# Altium PCB MCU103A.PcbDoc (part 5 of 6)
Units mm, origin at the board's own origin, x right, y up, seen from the top; angles counter-clockwise.
Board outline 58.42 x 139.7 mm, 4 copper layers (Top Signal, GND, PWR, Bottom Signal), stack 1.565 mm thick; 256 components, 210 nets, 1058 pads, 772 vias.
Unrouted connection lines stored in the file: 237.
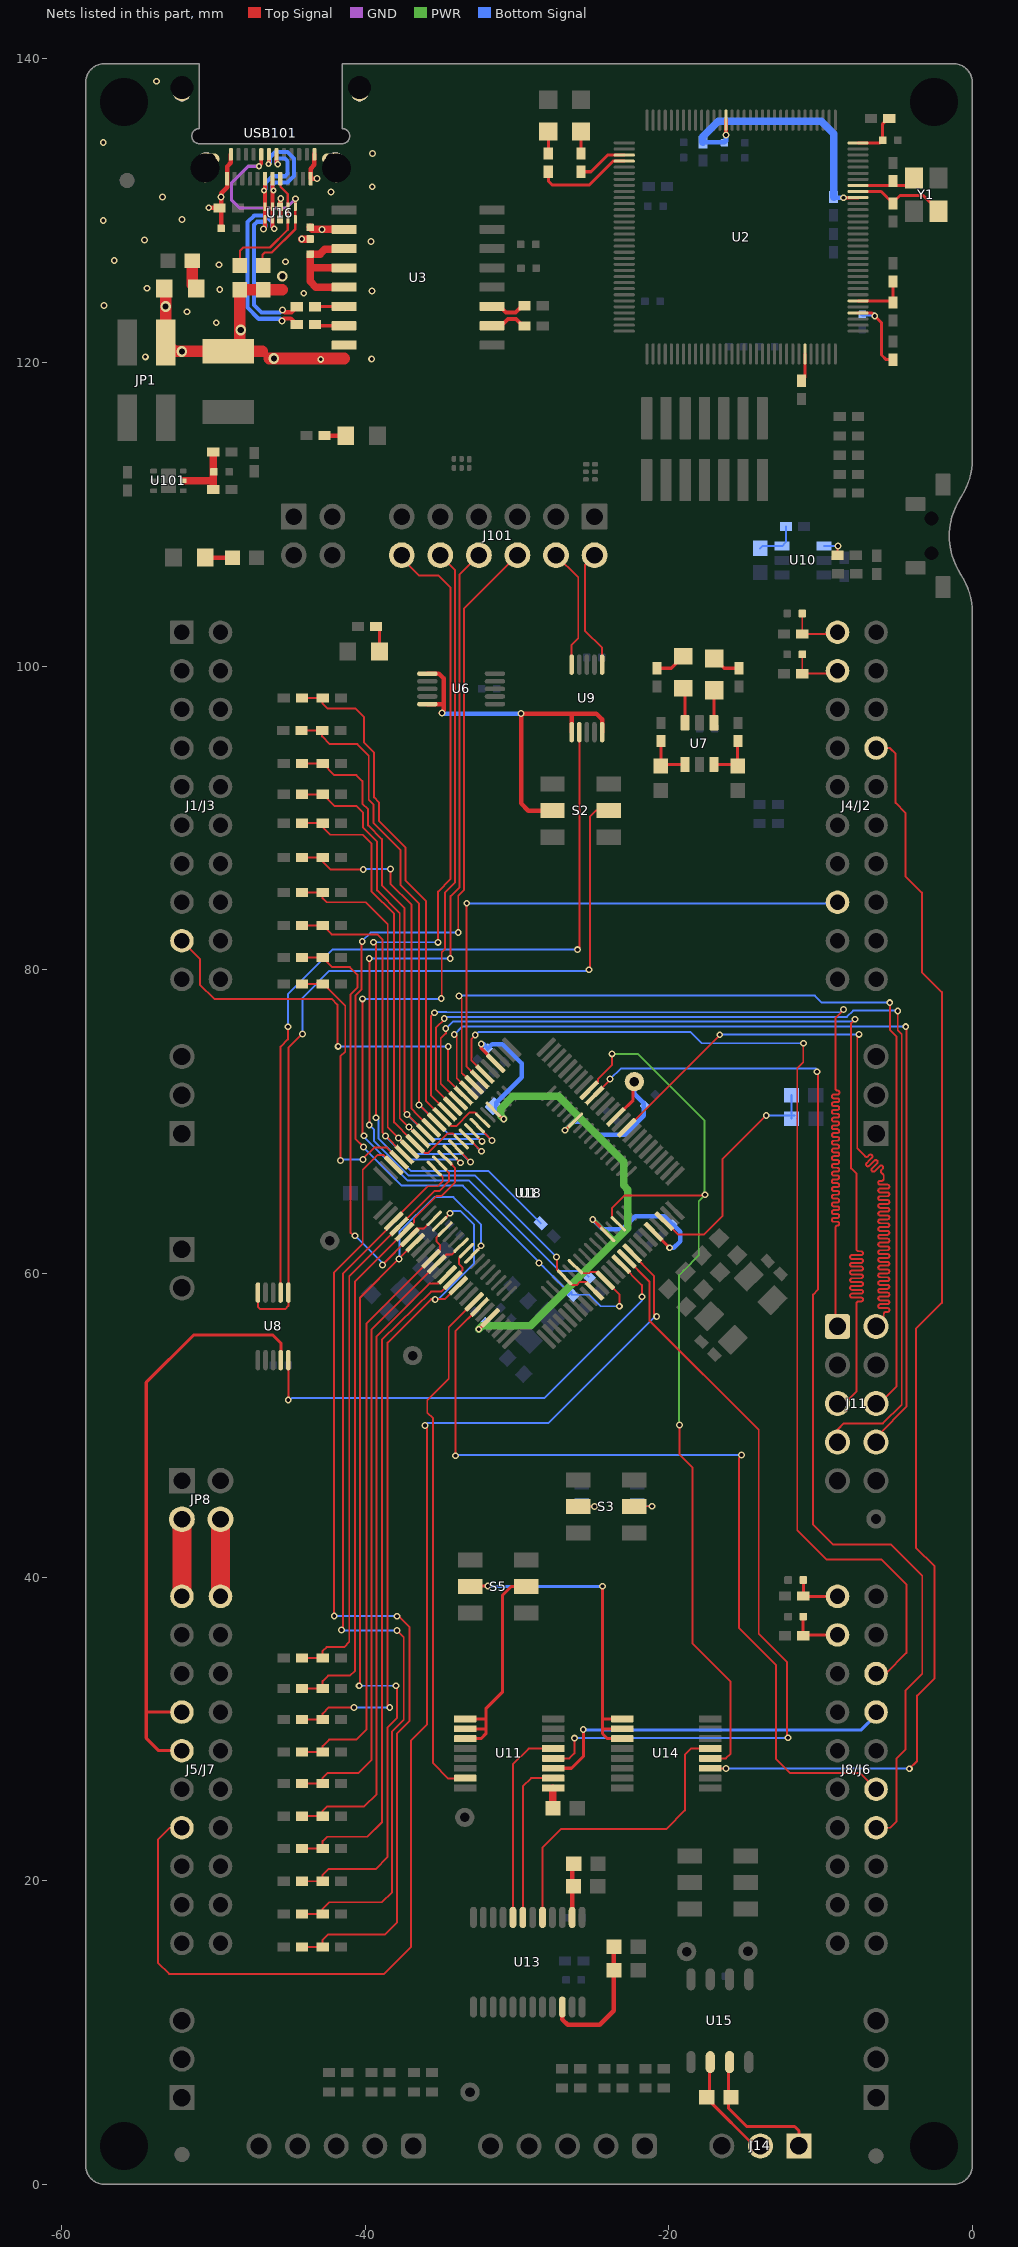
[diagram p6: the nets of this part, all layers, seen from the top]

## Via types
v1: diameter 0.45, hole 0.25, Top Signal to Bottom Signal, tented both sides, 726 vias
v2: diameter 0.5, hole 0.3, Top Signal to Bottom Signal, tented both sides, 22 vias
v3: diameter 0.7, hole 0.4, Top Signal to Bottom Signal, tented both sides, 17 vias
v4: diameter 0.4, hole 0.2, Top Signal to Bottom Signal, tented both sides, 5 vias
v5: diameter 0.5, hole 0.2, Top Signal to Bottom Signal, 2 vias

## Nets (pads, with @x,y where several pads share a name; then routed paths per layer and width w, separated by ;. In a path a pad name is that pad's centre, name@x,y a point inside that pad or via, vN(x,y) a via of type N, cw(c..) or ccw(c..) an arc to the next point about the centre after c; other vN are vias at no path point) (continued)
GPIO44_FSITXCLK: J11.2 U1.85 | length 62.2
  Top Signal w0.127: U1.85@-22.776,69.605 -22.316,70.065 -22.292,70.065 -16.651,75.706 v1(-16.651,75.734) ; v1@-7.59,75.728 -7.59,68.237 -7.072,67.719 ccw(c-6.982,67.808) -6.892,67.719 -6.812,67.798 cw(c-6.723,67.709) -6.633,67.798 cw(c-6.723,67.709) -6.633,67.619 -6.802,67.449 -6.972,67.28 ccw(c-6.882,67.19) -6.972,67.1 ccw(c-6.882,67.19) -6.792,67.1 -6.623,67.27 -6.453,67.439 cw(c-6.363,67.349) -6.274,67.439 cw(c-6.363,67.349) -6.274,67.26 -6.443,67.09 -6.613,66.921 ccw(c-6.523,66.831) -6.613,66.741 ccw(c-6.523,66.831) -6.433,66.741 -6.264,66.91 -6.094,67.08 cw(c-6.004,66.99) -5.914,67.08 cw(c-6.004,66.99) -5.914,66.9 -5.994,66.821 ccw(c-5.904,66.731) -5.994,66.641 -5.904,66.551 -5.842,66.489 -5.842,66.362 -5.842,66.235 cw(c-5.969,66.235) -5.969,66.108 -6.082,66.108 ccw(c-6.082,65.981) -6.209,65.981 ccw(c-6.082,65.981) -6.082,65.854 -5.842,65.854 -5.602,65.854 cw(c-5.602,65.727) -5.475,65.727 cw(c-5.602,65.727) -5.602,65.6 -5.842,65.6 -6.082,65.6 ccw(c-6.082,65.473) -6.209,65.473 ccw(c-6.082,65.473) -6.082,65.346 -5.842,65.346 -5.602,65.346 cw(c-5.602,65.219) -5.475,65.219 cw(c-5.602,65.219) -5.602,65.092 -5.842,65.092 -6.082,65.092 ccw(c-6.082,64.965) -6.209,64.965 ccw(c-6.082,64.965) -6.082,64.838 -5.842,64.838 -5.602,64.838 cw(c-5.602,64.711) -5.475,64.711 cw(c-5.602,64.711) -5.602,64.584 -5.842,64.584 -6.082,64.584 ccw(c-6.082,64.457) -6.209,64.457 ccw(c-6.082,64.457) -6.082,64.33 -5.842,64.33 -5.602,64.33 cw(c-5.602,64.203) -5.475,64.203 cw(c-5.602,64.203) -5.602,64.076 -5.842,64.076 -6.082,64.076 ccw(c-6.082,63.949) -6.209,63.949 ccw(c-6.082,63.949) -6.082,63.822 -5.842,63.822 -5.602,63.822 cw(c-5.602,63.695) -5.475,63.695 cw(c-5.602,63.695) -5.602,63.568 -5.842,63.568 -6.082,63.568 ccw(c-6.082,63.441) -6.209,63.441 ccw(c-6.082,63.441) -6.082,63.314 -5.842,63.314 -5.602,63.314 cw(c-5.602,63.187) -5.475,63.187 cw(c-5.602,63.187) -5.602,63.06 -5.842,63.06 -6.082,63.06 ccw(c-6.082,62.933) -6.209,62.933 ccw(c-6.082,62.933) -6.082,62.806 -5.842,62.806 -5.602,62.806 cw(c-5.602,62.679) -5.475,62.679 cw(c-5.602,62.679) -5.602,62.552 -5.842,62.552 -6.082,62.552 ccw(c-6.082,62.425) -6.209,62.425 ccw(c-6.082,62.425) -6.082,62.298 -5.842,62.298 -5.602,62.298 cw(c-5.602,62.171) -5.475,62.171 cw(c-5.602,62.171) -5.602,62.044 -5.842,62.044 -6.082,62.044 ccw(c-6.082,61.917) -6.209,61.917 ccw(c-6.082,61.917) -6.082,61.79 -5.842,61.79 -5.602,61.79 cw(c-5.602,61.663) -5.475,61.663 cw(c-5.602,61.663) -5.602,61.536 -5.842,61.536 -6.082,61.536 ccw(c-6.082,61.409) -6.209,61.409 ccw(c-6.082,61.409) -6.082,61.282 -5.842,61.282 -5.602,61.282 cw(c-5.602,61.155) -5.475,61.155 cw(c-5.602,61.155) -5.602,61.028 -5.842,61.028 -6.082,61.028 ccw(c-6.082,60.901) -6.209,60.901 ccw(c-6.082,60.901) -6.082,60.774 -5.842,60.774 -5.602,60.774 cw(c-5.602,60.647) -5.475,60.647 cw(c-5.602,60.647) -5.602,60.52 -5.842,60.52 -6.082,60.52 ccw(c-6.082,60.393) -6.209,60.393 ccw(c-6.082,60.393) -6.082,60.266 -5.842,60.266 -5.602,60.266 cw(c-5.602,60.139) -5.475,60.139 cw(c-5.602,60.139) -5.602,60.012 -5.842,60.012 -6.082,60.012 ccw(c-6.082,59.885) -6.209,59.885 ccw(c-6.082,59.885) -6.082,59.758 -5.842,59.758 -5.602,59.758 cw(c-5.602,59.631) -5.475,59.631 cw(c-5.602,59.631) -5.602,59.504 -5.842,59.504 -6.082,59.504 ccw(c-6.082,59.377) -6.209,59.377 ccw(c-6.082,59.377) -6.082,59.25 -5.842,59.25 -5.602,59.25 cw(c-5.602,59.123) -5.475,59.123 cw(c-5.602,59.123) -5.602,58.996 -5.842,58.996 -6.082,58.996 ccw(c-6.082,58.869) -6.209,58.869 ccw(c-6.082,58.869) -6.082,58.742 -5.842,58.742 -5.602,58.742 cw(c-5.602,58.615) -5.475,58.615 cw(c-5.602,58.615) -5.602,58.488 -5.842,58.488 -6.082,58.488 ccw(c-6.082,58.361) -6.209,58.361 ccw(c-6.082,58.361) -6.082,58.234 -5.842,58.234 -5.602,58.234 cw(c-5.602,58.107) -5.475,58.107 cw(c-5.602,58.107) -5.602,57.98 -5.842,57.98 -6.082,57.98 ccw(c-6.082,57.853) -6.209,57.853 ccw(c-6.082,57.853) -6.082,57.726 -5.842,57.726 -5.602,57.726 cw(c-5.602,57.599) -5.475,57.599 cw(c-5.602,57.599) -5.602,57.472 -5.715,57.472 ccw(c-5.715,57.345) -5.842,57.345 -5.842,57.218 -5.842,57.023 J11.2@-6.35,56.515
  Bottom Signal w0.127: v1@-16.651,75.64 -16.55,75.741 v1@-7.477,75.741
  other v1: -7.477,75.755
GPIO47: J8/J6.58 U1.6 | length 73
  Top Signal w0.127: v1(-32.745,75.703) -32.985,75.463 -32.985,74.017 U1.6@-32.11,73.141 ; v1@-11.144,75.202 -11.144,73.92 -11.543,73.521 -11.543,43.091 -9.608,41.156 -5.991,41.156 -4.357,39.522 -4.357,35.016 -5.718,33.655 J8/J6.58@-6.35,33.655
  Bottom Signal w0.127: v1(-32.745,75.703) -32.542,75.906 -18.562,75.906 -17.823,75.167 v1@-11.12,75.167
  other v1: -11.128,75.174
GPIO48: J4/J2.33 U1.7 | length 36.5
  Top Signal w0.127: v1@-33.18,84.368 -33.312,84.236 -33.312,73.637 U1.7@-32.463,72.787
  Bottom Signal w0.127: v1(-33.305,84.385) -9.016,84.385 -8.988,84.357 J4/J2.33@-8.89,84.455
GPIO49_FSITXD0: J11.6 U1.8 | length 62.1
  Top Signal w0.127: v1(-33.813,78.272) -33.639,78.098 -33.639,73.206 -33.551,73.117 -32.868,72.434 U1.8@-32.817,72.434 ; J11.6@-6.35,51.435 -6.134,51.435 -5.01,52.559 -5.01,75.619 -5.443,76.052 v1(-5.443,77.843)
  Bottom Signal w0.127: v1(-33.813,78.272) -33.779,78.306 -10.385,78.306 -9.93,77.851 -8.689,77.851 -8.684,77.856 -5.448,77.856 v1@-5.443,77.851
GPIO50_FSITXD1: J11.8 U1.9 | length 61.6
  Top Signal w0.127: v1(-34.13,75.74) -34.083,75.74 -33.966,75.623 -33.966,72.876 U1.9@-33.17,72.08 ; J11.8@-6.147,49.428 -4.348,51.227 v1@-4.348,76.262
  Bottom Signal w0.127: v1(-34.13,75.74) -33.59,76.28 v1@-4.392,76.28
  other v1: -4.392,76.262
GPIO51: J1/J3.9 U1.10 | length 26.6
  Top Signal w0.127: J1/J3.9@-52.07,81.915 -50.884,80.729 -50.884,79.038 -49.938,78.092 -42.211,78.092 -41.837,77.718 -41.837,75.122 v1@-41.68,74.965 ; v1(-34.532,74.96) -34.532,72.729 -33.53,71.727 U1.10@-33.524,71.727
  Bottom Signal w0.127: v1@-41.654,74.949 -34.571,74.949 -34.539,74.981 v1@-34.532,74.974
  other v1: -41.78,74.965
GPIO52_FSIRXD0: J11.5 U1.11 | length 68.5
  Top Signal w0.127: v1(-34.689,76.139) -34.689,75.822 -35.021,75.49 -35.021,72.516 U1.11@-33.877,71.373 ; J11.5@-8.928,51.435 J11.5@-8.89,51.435 -8.438,51.435 -7.635,52.238 -7.635,57.531 -7.635,58.039 cw(c-7.508,58.039) -7.508,58.166 -7.337,58.166 ccw(c-7.337,58.293) -7.21,58.293 ccw(c-7.337,58.293) -7.337,58.42 -7.635,58.42 -7.933,58.42 cw(c-7.933,58.547) -8.06,58.547 cw(c-7.933,58.547) -7.933,58.674 -7.635,58.674 -7.337,58.674 ccw(c-7.337,58.801) -7.21,58.801 ccw(c-7.337,58.801) -7.337,58.928 -7.635,58.928 -7.933,58.928 cw(c-7.933,59.055) -8.06,59.055 cw(c-7.933,59.055) -7.933,59.182 -7.635,59.182 -7.337,59.182 ccw(c-7.337,59.309) -7.21,59.309 ccw(c-7.337,59.309) -7.337,59.436 -7.635,59.436 -7.933,59.436 cw(c-7.933,59.563) -8.06,59.563 cw(c-7.933,59.563) -7.933,59.69 -7.635,59.69 -7.337,59.69 ccw(c-7.337,59.817) -7.21,59.817 ccw(c-7.337,59.817) -7.337,59.944 -7.635,59.944 -7.933,59.944 cw(c-7.933,60.071) -8.06,60.071 cw(c-7.933,60.071) -7.933,60.198 -7.635,60.198 -7.337,60.198 ccw(c-7.337,60.325) -7.21,60.325 ccw(c-7.337,60.325) -7.337,60.452 -7.635,60.452 -7.933,60.452 cw(c-7.933,60.579) -8.06,60.579 cw(c-7.933,60.579) -7.933,60.706 -7.635,60.706 -7.337,60.706 ccw(c-7.337,60.833) -7.21,60.833 ccw(c-7.337,60.833) -7.337,60.96 -7.635,60.96 -7.933,60.96 cw(c-7.933,61.087) -8.06,61.087 cw(c-7.933,61.087) -7.933,61.214 -7.635,61.214 -7.337,61.214 ccw(c-7.337,61.341) -7.21,61.341 ccw(c-7.337,61.341) -7.337,61.468 -7.508,61.468 cw(c-7.508,61.595) -7.635,61.595 -7.635,66.568 -7.989,66.922 -7.989,76.502 v1(-7.744,76.747)
  Bottom Signal w0.127: v1(-34.689,76.139) -34.234,76.594 -7.935,76.594 v1@-7.771,76.758
GPIO53_FSIRXD1: J11.7 U1.12 | length 68.9
  Top Signal w0.127: v1(-34.787,76.789) -34.739,76.789 -35.348,76.181 -35.348,72.136 U1.12@-34.231,71.02 ; J11.7@-9.17,48.895 J11.7@-8.89,48.895 -8.89,49.718 -8.479,50.129 -5.901,50.129 -4.66,51.37 -4.66,75.75 -4.923,76.013 v1(-4.923,77.295)
  Top Signal w0.2: U1.12@-34.231,71.02 U1.12@-34.231,71.09
  Bottom Signal w0.127: v1@-34.758,76.808 -34.739,76.789 v1(-34.787,76.789) -34.677,76.899 -8.278,76.899 -7.855,77.322 v1@-4.818,77.322
GPIO54_FSIRXCLK: J11.1 U1.13 | length 68.9
  Top Signal w0.127: v1(-35.438,77.178) -35.675,76.941 -35.675,71.756 U1.13@-34.584,70.666 ; J11.1@-8.89,56.515 -8.637,56.515 -8.467,56.685 -9.017,57.235 -9.017,61.468 -9.017,63.03 cw(c-8.89,63.03) -8.89,63.157 -8.9,63.157 ccw(c-8.9,63.284) -8.773,63.284 ccw(c-8.9,63.284) -8.9,63.411 -9.017,63.411 -9.134,63.411 cw(c-9.134,63.538) -9.261,63.538 cw(c-9.134,63.538) -9.134,63.665 -9.017,63.665 -8.9,63.665 ccw(c-8.9,63.792) -8.773,63.792 ccw(c-8.9,63.792) -8.9,63.919 -9.017,63.919 -9.134,63.919 cw(c-9.134,64.046) -9.261,64.046 cw(c-9.134,64.046) -9.134,64.173 -9.017,64.173 -8.9,64.173 ccw(c-8.9,64.3) -8.773,64.3 ccw(c-8.9,64.3) -8.9,64.427 -9.017,64.427 -9.134,64.427 cw(c-9.134,64.554) -9.261,64.554 cw(c-9.134,64.554) -9.134,64.681 -9.017,64.681 -8.9,64.681 ccw(c-8.9,64.808) -8.773,64.808 ccw(c-8.9,64.808) -8.9,64.935 -9.017,64.935 -9.134,64.935 cw(c-9.134,65.062) -9.261,65.062 cw(c-9.134,65.062) -9.134,65.189 -9.017,65.189 -8.9,65.189 ccw(c-8.9,65.316) -8.773,65.316 ccw(c-8.9,65.316) -8.9,65.443 -9.017,65.443 -9.134,65.443 cw(c-9.134,65.57) -9.261,65.57 cw(c-9.134,65.57) -9.134,65.697 -9.017,65.697 -8.9,65.697 ccw(c-8.9,65.824) -8.773,65.824 ccw(c-8.9,65.824) -8.9,65.951 -9.017,65.951 -9.134,65.951 cw(c-9.134,66.078) -9.261,66.078 cw(c-9.134,66.078) -9.134,66.205 -9.017,66.205 -8.9,66.205 ccw(c-8.9,66.332) -8.773,66.332 ccw(c-8.9,66.332) -8.9,66.459 -9.017,66.459 -9.134,66.459 cw(c-9.134,66.586) -9.261,66.586 cw(c-9.134,66.586) -9.134,66.713 -9.017,66.713 -8.9,66.713 ccw(c-8.9,66.84) -8.773,66.84 ccw(c-8.9,66.84) -8.9,66.967 -9.017,66.967 -9.134,66.967 cw(c-9.134,67.094) -9.261,67.094 cw(c-9.134,67.094) -9.134,67.221 -9.017,67.221 -8.9,67.221 ccw(c-8.9,67.348) -8.773,67.348 ccw(c-8.9,67.348) -8.9,67.475 -9.017,67.475 -9.134,67.475 cw(c-9.134,67.602) -9.261,67.602 cw(c-9.134,67.602) -9.134,67.729 -9.017,67.729 -8.9,67.729 ccw(c-8.9,67.856) -8.773,67.856 ccw(c-8.9,67.856) -8.9,67.983 -9.017,67.983 -9.134,67.983 cw(c-9.134,68.11) -9.261,68.11 cw(c-9.134,68.11) -9.134,68.237 -9.017,68.237 -8.9,68.237 ccw(c-8.9,68.364) -8.773,68.364 ccw(c-8.9,68.364) -8.9,68.491 -9.017,68.491 -9.134,68.491 cw(c-9.134,68.618) -9.261,68.618 cw(c-9.134,68.618) -9.134,68.745 -9.017,68.745 -8.9,68.745 ccw(c-8.9,68.872) -8.773,68.872 ccw(c-8.9,68.872) -8.9,68.999 -9.017,68.999 -9.134,68.999 cw(c-9.134,69.126) -9.261,69.126 cw(c-9.134,69.126) -9.134,69.253 -9.017,69.253 -8.9,69.253 ccw(c-8.9,69.38) -8.773,69.38 ccw(c-8.9,69.38) -8.9,69.507 -9.017,69.507 -9.134,69.507 cw(c-9.134,69.634) -9.261,69.634 cw(c-9.134,69.634) -9.134,69.761 -9.017,69.761 -8.9,69.761 ccw(c-8.9,69.888) -8.773,69.888 ccw(c-8.9,69.888) -8.9,70.015 -9.017,70.015 -9.134,70.015 cw(c-9.134,70.142) -9.261,70.142 cw(c-9.134,70.142) -9.134,70.269 -9.017,70.269 -8.9,70.269 ccw(c-8.9,70.396) -8.773,70.396 ccw(c-8.9,70.396) -8.9,70.523 -9.017,70.523 -9.134,70.523 cw(c-9.134,70.65) -9.261,70.65 cw(c-9.134,70.65) -9.134,70.777 -9.017,70.777 -8.9,70.777 ccw(c-8.9,70.904) -8.773,70.904 ccw(c-8.9,70.904) -8.9,71.031 -9.017,71.031 -9.134,71.031 cw(c-9.134,71.158) -9.261,71.158 cw(c-9.134,71.158) -9.134,71.285 -9.017,71.285 -8.9,71.285 ccw(c-8.9,71.412) -8.773,71.412 ccw(c-8.9,71.412) -8.9,71.539 -9.017,71.539 -9.134,71.539 cw(c-9.134,71.666) -9.261,71.666 cw(c-9.134,71.666) -9.134,71.793 -9.017,71.793 -8.89,71.793 ccw(c-8.89,71.92) -8.763,71.92 ccw(c-8.89,71.92) -8.89,72.047 cw(c-8.89,72.174) -9.017,72.174 -9.017,76.864 v1(-8.491,77.39)
  Bottom Signal w0.127: v1(-35.438,77.178) -35.388,77.228 -34.657,77.228 -34.639,77.21 -8.671,77.21 v1(-8.491,77.39)
GPIO55: U1.43 U11.15 | length 34.7
  Top Signal w0.127: U11.15@-33.135,26.731 -34.513,26.731 -35.532,27.75 -35.532,50.465 -35.912,50.845 -35.912,51.64 -34.498,53.055 -34.498,56.469 U1.43@-32.817,58.15
GPIO55_Q2B: U11.2 U13.7 | length 10.9
  Top Signal w0.127: U13.7@-29.618,17.588 -29.618,26.216 -29.069,26.765 U11.2@-27.612,26.765
GPIO56: U1.65 U8.10 | length 31.4
  Top Signal w0.127: v1@-45.064,51.849 U8.10@-45.064,54.299 ; U1.65@-23.149,60.616 -21.774,59.241 -21.774,58.57 v1@-21.712,58.508
  Bottom Signal w0.127: v1@-45.033,51.589 -44.825,51.797 -28.2,51.797 -21.761,58.236 v1(-21.761,58.476)
  other v1: -45.063,51.668
GPIO56_BP: J5/J7.44 J5/J7.45 U8.9 | length 40.3
  Top Signal w0.2: J5/J7.45@-52.07,28.575 -53.601,28.575 -54.421,29.395 -54.421,31.195 ; J5/J7.44@-52.07,31.115 -54.341,31.115 -54.421,31.195 ; U8.9@-45.543,54.027 -45.543,55.418 -46.067,55.942 -51.311,55.942 -54.421,52.832 -54.421,31.195
GPIO56_SCITX: U8.2 U9.2 | length 55.1
  Top Signal w0.127: U8.2@-45.564,58.749 -45.564,74.951 -45.091,75.424 v1(-45.091,76.253) ; v1@-26.019,81.327 -25.877,81.469 U9.2@-25.877,96.2
  Bottom Signal w0.127: v1@-45.082,76.278 -45.082,78.419 -42.168,81.333 v1(-26.008,81.333)
GPIO57: U1.66 U11.4 | length 52.5
  Top Signal w0.127: U11.4@-27.612,28.065 -26.547,28.065 -26.217,28.395 v1(-26.217,29.398) ; U1.66@-22.839,61.029 -21.273,59.463 -21.273,56.899 -14.077,49.703 -14.077,36.275 -12.209,34.407 -12.209,29.477 v1(-12.156,29.424)
  Bottom Signal w0.127: v1(-26.217,29.398) v1@-12.288,29.398
GPIO57_BP: J8/J6.57 U11.3 | length 24
  Top Signal w0.2: U11.3@-27.612,27.415 -26.407,27.415 -25.633,28.189 -25.634,28.19 v1(-25.634,29.961)
  Bottom Signal w0.2: v1(-25.634,29.961) -25.619,29.946 -7.317,29.946 -6.35,30.913 J8/J6.57@-6.35,31.115
GPIO57_Q2I: U11.5 U13.8 | length 13.2
  Top Signal w0.127: U13.8@-30.268,17.588 -30.268,27.678 -29.231,28.715 U11.5@-27.612,28.715
GPIO58: J5/J7.47 U1.67 | length 85.7
  Top Signal w0.127: J5/J7.47@-52.07,23.495 -52.862,23.495 -53.659,22.698 -53.659,14.616 -52.917,13.874 -38.746,13.874 -36.978,15.642 -36.978,29.248 -35.921,30.305 -35.921,49.913 -35.992,49.984 v1(-36.069,49.984) ; U1.67@-22.452,61.32 -20.963,59.831 -20.963,57.325 v1(-20.801,57.163)
  Bottom Signal w0.127: v1(-36.069,49.984) -35.893,50.16 -27.924,50.16 v1@-20.861,57.223
GPIO59: U1.92 U14.4 U18.46 | length 63.1
  Top Signal w0.127: U1.92@-24.891,72.419 -24.666,72.645 -24.666,72.811 -23.733,73.744 v1@-23.733,74.471 ; U18.46@-23.519,63.504 -23.744,63.729 -23.744,64.311 -22.923,65.132 -17.669,65.132 v1(-17.614,65.187) ; v1(-19.299,50.021) -19.299,48.084 -18.449,47.234 -18.449,35.648 -15.927,33.126 -15.927,28.376 -16.238,28.065 U14.4@-17.265,28.065
  PWR w0.127: v1(-23.746,74.471) -22.043,74.471 -17.638,70.066 -17.638,65.197 v1@-17.628,65.187 ; v1@-19.325,50.021 -19.325,59.891 -19.025,60.191 -19.025,60.194 -18.029,61.19 -18.029,64.772 v1(-17.614,65.187)
GPIO59_BP: J4/J2.17 U14.3 | length 84.6
  Top Signal w0.127: U14.3@-17.265,27.415 -17.249,27.399 v1(-16.242,27.399) ; J4/J2.17@-6.35,94.615 -5.432,94.615 -5.063,94.246 -5.063,90.998 -4.417,90.352 -4.417,86.178 -3.332,85.093 -3.332,79.857 -2.016,78.541 -2.016,58.061 -3.722,56.355 -3.722,41.942 -2.491,40.711 -2.491,33.355 -3.649,32.197 -3.649,27.893 v1(-4.158,27.384)
  Bottom Signal w0.127: v1(-16.242,27.399) -4.173,27.399 v1(-4.158,27.384)
GPIO59_Q1I: U13.5 U14.5 | length 20.5
  Top Signal w0.127: U13.5@-28.318,17.588 -28.318,22.205 -27.1,23.423 -20.151,23.423 -18.937,24.637 -18.937,28.318 -18.54,28.715 U14.5@-17.265,28.715
GPIO60: J8/J6.55 U1.44 | length 57.7
  Top Signal w0.127: v1(-34.055,47.998) -34.055,56.205 U1.44@-32.463,57.797 ; v1@-15.181,48.043 -15.385,47.839 -15.385,36.664 -12.936,34.215 -12.936,28.017 -12.008,27.089 -7.404,27.089 J8/J6.55@-6.35,26.035
  Bottom Signal w0.127: v1@-33.898,48.037 -33.892,48.043 v1(-15.21,48.043)
GPIO61: J8/J6.54 U1.91 | length 73
  Top Signal w0.127: U1.91@-24.836,71.779 -23.924,72.692 -23.924,72.739 -23.842,72.82 v1(-23.881,72.82) ; v1@-10.082,73.294 v1(-10.248,73.294) -10.185,73.231 -10.185,58.934 -10.5,58.619 -10.5,43.465 -9.198,42.163 -5.382,42.163 -3.306,40.087 -3.306,33.65 -4.424,32.532 -4.424,28.645 -4.994,28.075 -4.994,23.915 -5.414,23.495 J8/J6.54@-6.35,23.495 J8/J6.54@-6.35,23.734
  Bottom Signal w0.127: v1(-23.881,72.82) -23.848,72.82 -23.168,73.5 -10.298,73.5 -10.248,73.45 v1(-10.248,73.294)
MCU_A0/B15/C15: C25.1 R12.2 U1.23 | length 65.1
  Top Signal w0.127: R12.2@-44.165,15.649 C25.1@-42.799,15.649 -42.799,16.115 -42.457,16.457 -38.698,16.457 -37.893,17.262 -37.893,29.711 -37.071,30.533 -37.071,36.706 v1@-37.834,37.469 ; v1(-42.041,37.453) -42.041,60.077 -40.16,61.958 -40.16,66.826 -39.176,67.81 -38.8,67.81 U1.23@-38.12,67.13
  Bottom Signal w0.127: v1(-42.041,37.453) -37.921,37.453 v1(-37.896,37.428)
MCU_A1/B17: C33.1 R13.2 U1.22 | length 18.5
  Top Signal w0.127: R13.2@-44.165,79.061 C33.1@-42.799,79.061 -42.732,79.061 -41.312,77.641 -41.312,74.619 -41.634,74.297 v1(-41.634,67.447) ; v1@-40.16,67.36 -40.16,67.548 -39.414,68.294 -38.576,68.294 U1.22@-37.766,67.484
  Bottom Signal w0.127: v1(-41.634,67.447) -41.568,67.513 v1(-40.143,67.513)
MCU_A2/B6/C9: C26.1 R14.2 U1.17 U18.8 | length 35.7
  Top Signal w0.127: R14.2@-44.165,93.599 C26.1@-42.799,93.599 -42.037,92.837 -40.577,92.837 -40.181,92.441 -40.181,90.946 -39.803,90.568 -39.803,89.52 -38.903,88.62 -38.903,85.562 -37.399,84.058 -37.399,70.655 -36.352,69.608 U1.17@-36.352,69.605 ; U18.8@-32.728,69.126 v1@-32.31,68.708 ; U18.8@-32.724,69.126 -32.309,68.71 v1(-32.309,68.707)
  Bottom Signal w0.127: v1(-37.248,70.472) -37.245,70.472 -35.642,68.869 -32.468,68.869 -32.309,68.71 v1(-32.309,68.707)
MCU_A3/B9/C7: C34.1 R15.2 U1.18 U18.9 | length 35.2
  Top Signal w0.127: R15.2@-44.165,91.567 C34.1@-42.799,91.567 -42.037,90.805 -40.582,90.805 -40.136,90.359 -40.136,89.371 -39.212,88.447 -39.212,85.236 -37.721,83.745 -37.721,70.238 -36.381,68.898 U1.18@-36.352,68.898 ; U18.9@-33.365,69.071 v1(-32.347,68.054) ; U18.9@-33.365,69.079 -32.832,68.547
  Bottom Signal w0.127: v1(-37.109,69.645) -36.006,68.542 -32.864,68.542 -32.376,68.054 v1(-32.347,68.054)
MCU_A4/B8: C27.1 R16.2 U1.36 U18.23 | length 41.8
  Top Signal w0.127: R16.2@-44.165,26.416 -42.844,26.416 C27.1@-42.799,26.461 ; C27.1@-42.799,26.416 C27.1@-42.799,26.461 ; U1.36@-35.342,60.562 -38.955,56.949 -39.55,56.354 -39.58,56.324 -39.58,27.963 -40.429,27.114 -42.476,27.114 -42.799,26.791 C27.1@-42.799,26.461 ; U1.36@-35.292,60.625 -34.665,61.252 -34.297,61.252 U18.23@-33.771,61.778
MCU_A5: C35.1 R17.2 U1.35 U18.20 | length 40.4
  Top Signal w0.127: R17.2@-44.165,28.479 C35.1@-42.799,28.479 -42.799,28.877 -42.376,29.3 -40.576,29.3 -39.907,29.969 -39.907,56.716 U1.35@-35.645,60.979 -35.079,61.545 -35.079,61.896 -35.31,62.127 -35.31,62.36 U18.20@-34.769,62.901 ; U18.20@-34.781,62.901 U18.20@-34.769,62.901 ; U18.20@-34.748,62.901 U18.20@-34.769,62.901 ; U18.20@-34.743,62.927 U18.20@-34.769,62.901
MCU_A6: C28.1 R18.2 U1.14 U18.6 | length 36.3
  Top Signal w0.127: R18.2@-44.165,97.917 C28.1@-42.799,97.917 -42.799,97.536 -42.492,97.229 -40.651,97.229 -40.076,96.642 -40.076,94.961 -39.417,94.302 -39.417,91.362 -39.093,91.038 -39.093,89.811 -37.334,88.052 -37.334,85.884 -36.002,84.551 -36.002,71.376 U1.14@-35.292,70.666 ; U1.14@-34.938,70.312 -34.336,69.71 -34.005,69.71 -33.099,70.616 -32.78,70.616 U18.6@-32.269,70.104
MCU_A7/C3: C36.1 R19.2 U1.31 U18.18 | length 29.9
  Top Signal w0.127: R19.2@-44.165,80.814 C36.1@-42.799,80.814 -42.164,80.179 -41.005,80.179 -40.511,79.685 -40.511,78.835 -40.961,78.385 -40.961,62.675 v1@-40.684,62.398 ; v1@-38.988,60.464 U1.31@-37.059,62.393 U1.31@-37.034,62.393 ; U1.31@-36.641,62.786 U1.31@-36.937,62.49 ; U18.18@-35.487,63.546 -35.539,63.546 -36.13,62.954 -36.62,62.954 -36.937,62.637 U1.31@-36.937,62.49 ; U1.31@-37.034,62.393 U1.31@-36.937,62.49 ; U1.31@-37.034,62.393 -36.937,62.393 U1.31@-36.937,62.49
  Bottom Signal w0.127: v1(-40.663,62.493) -40.663,62.48 v1@-40.632,62.45 ; v1(-38.855,60.569) -38.855,60.672 -40.598,62.416 v1@-40.631,62.448 ; v1@-40.632,62.45 v1@-40.631,62.448 ; v1@-40.632,62.45 -40.634,62.448 v1@-40.631,62.448
MCU_A9: C29.1 R20.2 U1.38 | length 42.1
  Top Signal w0.127: R20.2@-44.165,24.257 C29.1@-42.799,24.257 -42.799,24.603 -42.497,24.905 -40.067,24.905 -39.253,25.719 -39.253,55.856 -35.778,59.331 -35.187,59.331 U1.38@-34.674,59.844
MCU_A10/B1/C10: C37.1 R21.2 U1.40 U18.19 | length 45.9
  Top Signal w0.127: R21.2@-44.165,30.638 C37.1@-42.799,30.638 -42.799,31.009 -42.389,31.419 v1(-40.73,31.419) ; v1@-38.409,31.371 -38.529,31.491 -38.529,55.452 -35.663,58.318 -34.77,58.318 U1.40@-33.877,59.211 ; U18.19@-35.185,63.192 v1@-34.468,63.909
  Bottom Signal w0.127: v1(-40.73,31.419) -40.729,31.418 v1(-38.382,31.418) ; v1(-35.392,58.292) -35.378,58.292 -35.392,58.306 -35.199,58.306 -32.827,60.678 -32.827,63.204 -33.75,64.127 -34.199,64.127 v1@-34.413,63.913 ; v1@-34.421,63.905 v1@-34.413,63.913 ; v1(-34.413,63.976) v1@-34.413,63.913
MCU_A11/B10/C0: C30.1 R22.2 U1.20 U18.11 | length 29.8
  Top Signal w0.127: R22.2@-44.165,85.09 C30.1@-42.799,85.09 -42.799,84.709 -42.545,84.455 -39.975,84.455 -38.515,82.995 -38.515,69.647 U1.20@-37.059,68.191 ; U18.11@-34.072,68.364 v1(-33.054,67.347) ; U18.11@-34.072,68.372 -33.54,67.84
  Bottom Signal w0.127: v1(-37.81,68.936) -36.748,67.874 -33.61,67.874 -33.083,67.347 v1(-33.054,67.347)
MCU_A12/C5: C38.1 R23.2 U1.28 U18.15 | length 62.2
  Top Signal w0.127: R23.2@-44.165,17.811 C38.1@-42.799,17.811 -42.799,18.15 -42.36,18.589 -38.894,18.589 -38.222,19.261 -38.222,29.847 -37.459,30.61 -37.459,36.045 v1(-37.895,36.481) ; v1@-41.475,36.439 -41.475,59.976 -38.12,63.331 U1.28@-38.12,63.453 ; U1.28@-37.793,63.826 -35.868,65.751 -35.23,65.751 -34.892,66.089 -34.892,66.356 U18.15@-35.486,66.95 ; U18.15@-35.486,66.958 U18.15@-35.451,66.922 -34.954,66.426
  Bottom Signal w0.127: v1(-41.551,36.512) -41.52,36.481 v1(-37.895,36.481)
MCU_A14/B14/C4: C31.1 R24.2 U1.19 U18.10 | length 29.8
  Top Signal w0.127: R24.2@-44.165,89.662 C31.1@-42.799,89.662 -42.799,89.408 -42.291,88.9 -40.159,88.9 -39.591,88.332 -39.591,85.184 -38.101,83.694 -38.101,69.953 U1.19@-37.008,68.859 ; U1.19@-36.706,68.545 -36.105,67.944 -35.834,67.944 -34.551,69.227 -34.22,69.227 U18.10@-33.683,68.69
MCU_B2/C6: C39.1 R25.2 U1.15 U18.7 | length 39.3
  Top Signal w0.127: R25.2@-44.198,95.758 C39.1@-42.832,95.758 -42.832,95.377 -42.324,94.869 -40.52,94.869 -39.765,94.113 -39.765,91.218 -39.441,90.894 -39.441,89.667 -37.681,87.908 -37.681,85.599 -36.449,84.366 v1(-36.449,71.103) -35.305,69.959 U1.15@-35.292,69.959 ; U18.7@-32.657,69.778 v1(-31.64,68.761) ; U18.7@-32.657,69.786 -32.125,69.254
  Bottom Signal w0.127: v1(-36.449,71.103) -34.542,69.196 -32.107,69.196 -31.672,68.761 v1(-31.64,68.761)
MCU_B3: C32.1 R26.2 U1.16 | length 24.5
  Top Signal w0.127: R26.2@-44.165,87.411 C32.1@-42.799,87.411 -42.799,87.122 -42.291,86.614 v1(-40.132,86.614) ; v1(-38.342,86.642) -38.342,85.681 -36.943,84.282 -36.943,70.858 -36.759,70.674 -36.759,70.668 -35.696,69.605 U1.16@-35.645,69.605
  Bottom Signal w0.127: v1(-40.132,86.614) -40.104,86.642 v1(-38.342,86.642)
MCU_B4/C8: C40.1 R27.2 U1.39 U18.24 | length 47.1
  Top Signal w0.127: R27.2@-44.165,22.129 C40.1@-42.799,22.129 -42.799,22.61 -42.507,22.902 -39.848,22.902 -38.893,23.858 -38.893,55.646 -35.659,58.811 -34.984,58.811 U1.39@-34.231,59.564 -33.592,60.203 -33.592,60.409 -33.831,60.648 -33.831,61.011 U18.24@-33.329,61.512 ; U18.24@-33.367,61.487 -33.247,61.607 U18.24@-33.247,61.652
MCU_B5: C75.1 R84.2 U1.32 U18.25 | length 62.8
  Top Signal w0.127: R84.2@-44.165,19.97 C75.1@-42.799,19.97 -42.799,20.398 -42.423,20.774 -39.312,20.774 -38.532,21.554 -38.532,30.087 -37.893,30.726 -37.893,32.788 v1@-38.047,32.942 ; v1(-40.397,32.846) -40.341,32.902 -40.341,58.392 v1(-37.774,60.959) ; v1@-37.808,60.951 U1.32@-36.79,61.968 ; U18.25@-33.064,61.071 U18.25@-32.976,61.159 v1@-32.347,61.787
  Bottom Signal w0.127: v1@-40.451,32.846 -40.447,32.85 v1(-37.972,32.85) ; v1(-37.774,60.959) -37.741,60.992 -37.741,62.741 -35.451,65.031 -34.187,65.031 -32.369,63.213 -32.369,61.769 -32.376,61.777 v1(-32.376,61.832)
MCU_B11: C77.1 R85.2 U1.30 U18.13 | length 41.5
  Top Signal w0.127: R85.2@-44.165,32.67 C77.1@-42.799,32.67 -42.799,33.15 -42.437,33.512 -41.004,33.512 -40.668,33.848 -40.668,59.487 -37.798,62.357 U1.30@-37.746,62.357 ; U1.30@-37.413,62.746 -36.772,63.388 -36.772,63.643 -35.296,65.119 -34.969,65.119 -34.092,65.996 -34.092,66.97 U18.13@-34.779,67.657 ; U18.13@-34.779,67.665 -34.247,67.133
MCU_B12/C2: C76.1 R86.2 U1.21 U18.12 | length 27.3
  Top Signal w0.127: R86.2@-44.165,82.917 -42.812,82.917 C76.1@-42.799,82.93 -42.213,82.344 -39.208,82.344 -38.853,81.988 -38.853,69.277 U1.21@-37.413,67.838 ; U18.12@-34.143,67.711 v1@-33.724,67.293 ; U18.12@-34.139,67.711 v1(-33.721,67.293)
  Bottom Signal w0.127: v1(-38.662,69.058) -37.117,67.513 -33.94,67.513 v1(-33.721,67.293)
MCU_C1: C78.1 R87.2 U1.29 U18.14 | length 37.9
  Top Signal w0.127: R87.2@-44.165,34.671 C78.1@-42.799,34.671 -42.799,35.148 -42.546,35.401 -41.383,35.401 -41.05,35.734 -41.05,59.813 U1.29@-37.586,63.278 ; U1.29@-37.439,63.438 -35.431,65.446 -35.104,65.446 -34.484,66.066 -34.484,66.643 U18.14@-34.846,67.004
MCU_RXD: J101.2 U9.6 | length 7.9
  Top Signal w0.127: J101.2@-24.892,107.315 -25.526,106.681 -25.526,102.333 -24.397,101.204 U9.6@-24.397,100.11
MCU_TCK: J101.8 U1.60 U18.36 | length 64.5
  Top Signal w0.127: v1@-39.73,69.782 -39.73,80.646 v1@-39.575,80.801 ; v1@-39.69,69.746 v1@-39.581,69.855 ; v1(-34.392,80.754) -34.378,80.768 -34.378,84.856 -33.782,85.452 -33.782,106.045 J101.8@-32.512,107.315 ; v1(-27.407,61.09) -27.407,61.168 -27.372,61.203 -27.372,60.258 U18.36@-26.859,59.745 -26.355,59.241 -26.07,59.241 -25.865,59.445 -25.485,59.445 U1.60@-24.897,58.857
  Bottom Signal w0.127: v1@-39.757,69.813 -39.406,69.462 -39.406,68.729 -37.133,66.457 -32.751,66.457 -27.407,61.112 v1(-27.407,61.09) ; v1@-39.648,80.754 v1(-34.392,80.754)
  other v1: -39.729,69.782 -39.732,80.752
MCU_TDI: J101.12 R44.2 | length 58.1
  Top Signal w0.127: v1@-39.426,81.822 -39.294,81.69 -39.294,80.57 -39.295,80.569 -39.295,70.328 v1@-39.234,70.267 ; J101.12@-37.592,107.315 -37.592,107.111 -36.472,105.991 -35.194,105.991 -34.392,105.188 -34.392,85.973 -35.202,85.163 v1@-35.202,81.967
  Bottom Signal w0.127: v1(-39.448,81.822) v1@-35.218,81.822 ; v1(-39.291,70.267) -39.129,70.105 -39.129,68.901 -36.986,66.758 -31.881,66.758 R44.2@-28.434,63.31
  other v1: -35.211,81.815
MCU_TDO: J101.10 R45.2 | length 63.1
  Top Signal w0.127: v1@-40.168,78.225 -40.168,69.158 v1(-40.085,69.075) ; J101.10@-35.052,107.315 -34.087,106.35 -34.087,85.739 -34.747,85.079 -34.747,81.359 -34.959,81.147 v1@-34.959,78.058
  Bottom Signal w0.127: v1(-40.178,78.094) v1@-34.968,78.094 ; v1@-40.128,69.033 -37.228,66.133 -33.189,66.133 -27.229,60.173 -25.661,60.173 R45.2@-25.281,59.793
  other v1: -34.987,78.12
MCU_TMS: J101.6 R10.1 U1.62 U18.38 | length 73.5
  Top Signal w0.127: v1@-40.234,81.875 -40.234,78.72 -40.644,78.31 -40.644,68.873 v1(-40.106,68.335) ; v1(-33.869,82.462) -33.869,84.893 -33.477,85.285 -33.477,103.81 J101.6@-29.972,107.315 ; v1(-28.555,60.689) v1@-28.522,60.689 ; U18.38@-26.151,60.452 -25.72,60.02 -25.236,60.02 -25.16,60.096 -24.722,60.096 U1.62@-24.19,59.564 ; U1.62@-24.253,59.615 -23.238,58.6 -23.238,57.7 -23.259,57.721 v1(-23.259,57.844)
  Bottom Signal w0.127: v1(-40.192,81.875) -40.192,81.919 -39.649,82.462 v1(-33.869,82.462) ; v1(-40.106,68.335) -40.106,68.292 -37.603,65.789 -33.565,65.789 -28.465,60.689 v1@-28.501,60.689 ; v1(-28.555,60.689) v1@-28.501,60.689 ; R10.1@-26.605,58.582 R10.1@-26.499,58.688 ; R10.1@-26.407,58.78 R10.1@-26.448,58.739 ; R10.1@-26.4,58.601 -25.237,58.601 -24.48,57.844 v1(-23.259,57.844) ; R10.1@-26.345,58.635 R10.1@-26.448,58.739 ; v1@-28.501,60.689 -28.267,60.455 -28.267,60.443 -26.511,58.688 R10.1@-26.499,58.688 ; R10.1@-26.499,58.688 R10.1@-26.448,58.739
MCU_TXD: J101.4 U9.10 | length 8
  Top Signal w0.127: J101.4@-27.432,107.315 -25.966,105.849 -25.966,101.831 -26.397,101.401 U9.10@-26.397,100.11
NetC8_1: C8.1 R6.1 U10.6 | length 2.9
  Bottom Signal w0.127: R6.1@-13.99,107.77 -13.84,107.92 U10.6@-12.537,107.92 -12.289,108.168 C8.1@-12.289,109.204
NetC50_2: C50.2 R62.2 U2.96 | length 3.5
  Top Signal w0.2: U2.96@-7.535,134.47 -6.094,134.47 C50.2@-5.913,134.651 -5.913,135.729 -5.664,135.978 R62.2@-5.301,135.978
NetC59_1: C59.1 C60.2 C61.1 U2.87 U2.115 | length 18.5
  Top Signal w0.254: v1(-16.235,134.988) U2.115@-16.235,135.97 ; v1(-8.502,130.855) U2.87@-7.52,130.855
  Bottom Signal w0.254: -17.332,134.482 -17.331,134.483 ; C60.2@-16.336,134.483 C60.2@-16.235,134.584 ; C59.1@-9.143,130.909 C59.1@-9.089,130.855
  Bottom Signal w0.3: C61.1@-17.758,134.52 C60.2@-16.336,134.52 ; C60.2@-16.235,134.584 v1(-16.235,134.988) ; C59.1@-9.089,130.855 v1(-8.502,130.855)
  Bottom Signal w0.5: C61.1@-17.759,134.519 -17.759,134.888 -16.757,135.89 -9.969,135.89 -9.143,135.064 C59.1@-9.143,130.909
NetC62_1: C62.1 U2.89 Y1.3 | length 3.9
  Top Signal w0.2: U2.89@-7.535,131.67 -4.337,131.67 Y1.3@-3.843,132.164
NetC63_1: C63.1 U2.88 Y1.1 | length 6.3
  Top Signal w0.2: U2.88@-7.535,131.27 -6.016,131.27 C63.1@-5.232,130.486 -5.232,130.558 -4.779,131.011 -3.236,131.011 -2.243,130.018 Y1.1@-2.243,129.964
NetC66_2: C66.2 R70.1 U2.68 | length 5.7
  Top Signal w0.2: U2.68@-7.535,123.27 -6.629,123.27 -5.991,122.632 -5.991,120.498 -5.685,120.192 R70.1@-5.241,120.192
  Bottom Signal w0.3: C66.2@-7.251,123.183 -6.547,123.183 v1(-6.439,123.075)
NetC81_2: C81.2 J8/J6.79 R50.2 | length 3.6
  Top Signal w0.127: R50.2@-11.148,36.143 R50.2@-11.096,36.195
  Top Signal w0.2: C81.2@-11.205,37.405 -11.148,37.348 R50.2@-11.148,36.143 ; R50.2@-11.096,36.195 J8/J6.79@-8.89,36.195
NetC82_2: C82.2 J8/J6.80 R49.2 | length 3.2
  Top Signal w0.127: R49.2@-11.119,38.881 R49.2@-10.973,38.735
  Top Signal w0.2: C82.2@-11.148,39.814 -11.119,39.785 R49.2@-11.119,38.881 ; R49.2@-10.973,38.735 J8/J6.80@-8.89,38.735
NetC83_2: C83.2 J4/J2.39 R9.2 | length 3.7
  Top Signal w0.127: C83.2@-11.209,100.784 -11.212,100.781 R9.2@-11.212,99.51 -9.075,99.51 J4/J2.39@-8.89,99.695
NetC84_2: C84.2 J4/J2.40 R8.2 | length 3.7
  Top Signal w0.127: C84.2@-11.209,103.478 -11.212,103.475 R8.2@-11.212,102.12 -9.005,102.12 J4/J2.40@-8.89,102.235
NetC102_1: C102.1 R101.1 R102.2 U101.2 | length 4.4
  Top Signal w0.508: U101.2@-51.984,112.21 -50.052,112.21 ; R101.1@-50.003,111.633 R102.2@-50.003,114.122
NetC106_2: C106.2 U3.3 U3.4 U3.5 | length 8.8
  Top Signal w0.5: U3.5@-41.389,124.968 -43.247,124.968 -43.626,125.347 -43.626,126.254 ; U3.4@-41.389,126.238 -43.61,126.238 -43.626,126.254 ; U3.3@-41.389,127.508 -41.389,127.465 -42.656,127.465 -42.978,127.143 C106.2@-43.626,127.143 -43.626,126.254
NetJ5/J7_41: J5/J7.41 JP8.3 | length 5.1
  Top Signal w1.27: J5/J7.41@-52.07,38.735 JP8.3@-52.07,43.815
NetJ5/J7_61: J5/J7.61 JP8.4 | length 5.1
  Top Signal w1.27: J5/J7.61@-49.53,38.735 JP8.4@-49.53,43.815
NetJ14_1: J14.1 R79.2 U15.7 | length 9.3
  Top Signal w0.2: U15.7@-16.063,8.062 -16.063,5.014 -14.87,3.821 -11.714,3.821 -11.43,3.537 J14.1@-11.43,2.54
NetJ14_2: J14.2 R79.1 U15.6 | length 7.3
  Top Signal w0.2: U15.6@-17.333,8.255 -17.333,5.522 -14.351,2.54 J14.2@-13.97,2.54
NetLED0_2: LED0.2 R105.1 | length 1.4
  Top Signal w0.3: R105.1@-42.672,115.189 LED0.2@-41.284,115.189
NetLED1_2: LED1.2 R3.1 | length 1.8
  Top Signal w0.203: R3.1@-39.284,102.631 -39.056,102.403 LED1.2@-39.056,100.965
NetLED2_1: LED2.1 R63.1 | length 1.4
  Top Signal w0.2: R63.1@-25.781,133.772 LED2.1@-25.781,135.221
NetLED3_1: LED3.1 R64.1 | length 1.4
  Top Signal w0.2: R64.1@-27.94,133.772 LED3.1@-27.94,135.221
NetLED4_1: LED4.1 U7.6 | length 2.3
  Top Signal w0.203: LED4.1@-19.05,98.552 -18.932,98.434 U7.6@-18.932,96.283
NetLED4_2: LED4.2 R28.1 | length 2.1
  Top Signal w0.203: R28.1@-20.781,99.871 -19.831,99.871 LED4.2@-19.05,100.652
NetLED5_1: LED5.1 R29.1 | length 1.9
  Top Signal w0.203: LED5.1@-17.002,100.514 -16.359,99.871 R29.1@-15.367,99.871
NetLED5_2: LED5.2 U7.4 | length 2.1
  Top Signal w0.203: U7.4@-17.032,96.283 -17.032,98.309 LED5.2@-16.966,98.375
NetLED6_2: LED6.2 R43.1 | length 1.8
  Top Signal w0.3: LED6.2@-50.525,107.157 R43.1@-48.749,107.157
NetLED7_2: LED7.2 R7.1 | length 1.9
  Top Signal w0.762: R7.1@-51.392,126.704 -51.392,125.134 LED7.2@-51.134,124.876
NetR1_1: R1.1 U3.11 | length 2.4
  Top Signal w0.27: U3.11@-31.639,123.698 -31.134,123.698 -30.725,123.289 -30.091,123.289 R1.1@-29.635,123.745
NetR2_1: R2.1 U3.10 | length 2.4
  Top Signal w0.27: U3.10@-31.684,122.5 -30.954,122.5 -30.585,122.869 -30.074,122.869 R2.1@-29.617,122.412
NetR5_1: R5.1 U10.1 | length 1.5
  Top Signal w0.127: R5.1@-8.885,107.315 -8.885,107.904 v1(-8.865,107.925)
  Bottom Signal w0.127: U10.1@-9.787,107.92 -8.869,107.92 v1(-8.865,107.925)
NetR30_1: R30.1 R34.2 U7.1 | length 3.3
  Top Signal w0.203: R30.1@-20.522,95.07 R34.2@-20.522,93.422 -20.411,93.533 U7.1@-18.932,93.533
NetR31_1: R31.1 R35.2 U7.3 | length 3.3
  Top Signal w0.203: U7.3@-17.032,93.533 -15.579,93.533 R35.2@-15.468,93.422 -15.468,95.044 R31.1@-15.442,95.07
NetR38_2: R38.2 S3.5 | length 2.3
  Top Signal w0.127: S3.5@-25.973,44.652 -25.969,44.656 v1(-24.888,44.656)
  Bottom Signal w0.127: R38.2@-26.093,44.683 -26.066,44.656 v1(-24.888,44.656)
NetR39_1: R39.1 S3.2 | length 2.1
  Top Signal w0.127: S3.2@-22.273,44.652 -22.251,44.674 v1(-21.109,44.674)
  Bottom Signal w0.127: R39.1@-22.067,44.683 -22.058,44.674 v1(-21.109,44.674)
NetR41_1: R41.1 U11.1 | length 1.3
  Top Signal w0.5: R41.1@-27.636,24.792 U11.1@-27.636,26.089
NetR47_1: R47.1 R52.2 U13.2 | length 3.6
  Top Signal w0.3: U13.2@-26.368,17.588 -26.368,21.011 R52.2@-26.265,21.114
NetR48_1: R48.1 R53.1 U13.22 | length 9
  Top Signal w0.3: U13.22@-27.018,11.688 -27.018,10.87 -26.669,10.521 -24.548,10.521 -23.616,11.453 R53.1@-23.616,14.097 R48.1@-23.616,15.748
NetR63_2: R63.2 U2.3 | length 3.3
  Top Signal w0.2: R63.2@-25.781,132.572 -25.124,132.572 -24.026,133.67 U2.3@-22.935,133.67
NetR64_2: R64.2 U2.4 | length 6.4
  Top Signal w0.2: R64.2@-27.94,132.572 -27.94,131.966 -27.662,131.688 -25.26,131.688 -23.678,133.27 U2.4@-22.935,133.27
NetR65_1: R65.1 R67.2 U2.70 | length 3.7
  Top Signal w0.2: U2.70@-7.535,124.07 -5.332,124.07 R65.1@-5.232,123.97 R67.2@-5.232,125.349
NetR68_2: R68.2 U2.59 | length 1.9
  Top Signal w0.2: R68.2@-11.262,118.809 -11.035,119.036 U2.59@-11.035,120.57
NetR82_2: R82.2 R83.1 U1.73 | length 15.9
  Top Signal w0.127: U1.73@-20.238,63.403 -20.206,63.403 -19.363,62.56 -17.692,62.56 -16.474,63.778 -16.474,67.523 -13.58,70.417 v1(-13.58,70.412)
  Bottom Signal w0.127: v1(-13.58,70.412) -13.57,70.402 R82.2@-11.924,70.402 ; R83.1@-11.924,71.755 R82.2@-11.924,70.402 ; R82.2@-11.913,70.203 -11.924,70.214 R82.2@-11.924,70.402 ; R82.2@-11.709,70.402 R82.2@-11.924,70.402 ; R82.2@-11.568,70.214 R82.2@-11.557,70.203
NetR103_2: R103.2 U3.6 | length 1.9
  Top Signal w0.2: R103.2@-43.305,123.678 -43.285,123.698 U3.6@-41.389,123.698
NetR104_2: R104.2 U3.7 | length 1.9
  Top Signal w0.2: R104.2@-43.305,122.501 -43.232,122.428 U3.7@-41.389,122.428
QEP1_SEL: S5.5 U14.9 U14.10 U14.11 | length 22.5
  Top Signal w0.2: S5.5@-33.087,39.383 -33.057,39.413 v1(-31.932,39.413) ; v1(-24.367,39.399) -24.367,30.671 ; U14.11@-23.065,29.365 -24.038,29.365 -24.367,29.694 -24.367,30.059 ; U14.10@-23.065,30.015 -24.323,30.015 -24.367,30.059 ; U14.9@-23.065,30.665 -24.361,30.665 -24.367,30.671 ; -24.367,30.059 -24.367,30.671
  Bottom Signal w0.2: v1(-31.932,39.413) -31.918,39.399 v1(-24.367,39.399)
QEP2_SEL: S5.2 U11.9 U11.10 U11.11 | length 15.6
  Top Signal w0.2: U11.11@-33.412,29.365 -32.37,29.365 -32.05,29.685 -32.05,30.029 ; U11.10@-33.412,30.015 -32.064,30.015 -32.05,30.029 ; U11.9@-33.412,30.665 -32.069,30.665 -32.05,30.684 ; S5.2@-29.387,39.383 -30.388,39.383 -30.941,38.83 -30.941,32.448 -32.05,31.339 -32.05,30.684 ; -32.05,30.029 -32.05,30.684
SCI_SEL1: S2.2 U6.1 U6.5 U9.1 U9.5 | length 25.6
  Top Signal w0.3: U6.5@-35.903,97.509 -34.881,97.509 -34.838,97.466 ; U6.1@-35.903,99.509 -35.142,99.509 -34.838,99.205 -34.838,97.466 ; v1@-35.018,96.919 -34.835,97.102 -34.835,97.463 -34.838,97.466 ; S2.2@-27.661,90.491 -29.252,90.491 -29.733,90.972 v1(-29.733,96.886) -26.431,96.886 ; U9.1@-26.397,95.66 -26.397,96.852 -26.431,96.886 ; U9.5@-24.397,95.66 -24.397,96.497 -24.786,96.886 -26.431,96.886
  Bottom Signal w0.3: v1(-34.944,96.927) -34.903,96.886 v1(-29.733,96.886)
SCI_SEL2: S2.5 U8.1 U8.5 | length 54.9
  Top Signal w0.127: U8.5@-47.064,58.749 -47.064,57.802 -46.92,57.658 -45.271,57.658 -45.064,57.865 U8.1@-45.064,58.749 -45.064,74.887 -44.178,75.773 v1(-44.133,75.773) ; v1@-25.2,79.964 -25.2,90.102 -24.811,90.491 S2.5@-23.961,90.491
  Bottom Signal w0.127: v1@-44.059,75.773 -44.123,75.837 -44.123,78.156 -42.351,79.928 v1@-25.33,79.928
  other v1: -25.267,80.012
USB_CC1: R88.2 U16.4 U16.7 USB101.A5 | length 8.1
  Top Signal w0.152: R88.2@-48.25,126.4 -48.25,127.366 -48.03,127.586 -46.269,127.586 -45.097,128.758 -45.097,131.11 -45.572,131.585 USB101.A5@-45.572,131.92
USB_CC2: R89.2 U16.5 U16.6 USB101.B5 | length 14.3
  Top Signal w0.152: R89.2@-46.765,126.516 -46.765,127.099 -46.608,127.256 -46.15,127.256 -44.597,128.809 v1@-44.597,130.736
  Top Signal w0.2: v4(-46.986,132.933) -46.845,133.074 USB101.B5@-46.845,133.72
  GND w0.2: v4(-46.986,132.933) -47.707,132.933 -48.792,131.848 -48.792,130.695 -48.291,130.194 -45.191,130.194 v1(-44.596,130.789)
USB_DM: R103.1 U16.1 U16.10 USB101.A7 USB101.B7 | length 18.1
  Top Signal w0.27: v1(-46.701,128.802) -46.595,128.908 USB101.A7@-46.595,132.12 ; USB101.B7@-45.845,133.72 -45.845,133.152 v4(-45.758,133.065) ; v1(-45.448,123.467) -45.3,123.319 -44.864,123.319 R103.1@-44.505,123.678
  Bottom Signal w0.27: v1(-46.701,128.802) -46.553,128.95 -46.553,129.088 -46.741,129.276 -47.131,129.276 -47.329,129.078 -47.329,123.8 -46.838,123.309 -45.622,123.309 ; v4(-46.663,131.343) -46.562,131.444 -46.562,131.831 -46.12,132.273 -45.291,132.273 -45.105,132.459 -45.105,133.265 -45.288,133.448 -45.751,133.448 -45.86,133.339 -45.86,133.167 v4(-45.758,133.065) ; v1@-45.606,123.309 v1(-45.448,123.467)
USB_DP: R104.1 U16.2 U16.9 USB101.A6 USB101.B6 | length 21.6
  Top Signal w0.2: v4(-46.365,133.077) v4@-46.345,133.097
  Top Signal w0.27: v4@-46.345,133.097 USB101.B6@-46.345,133.72 ; USB101.A6@-46.095,132.12 -46.095,131.343 -46.095,128.924 v1(-45.986,128.815) ; v1(-45.483,122.75) -45.334,122.899 -44.903,122.899 R104.1@-44.505,122.501
  Bottom Signal w0.27: v4(-46.365,133.077) -46.28,133.162 -46.28,133.513 -45.925,133.868 -45.114,133.868 -44.685,133.439 -44.685,132.285 -45.117,131.853 -45.946,131.853 -46.142,131.657 -46.142,131.444 v4(-46.041,131.343) ; v1(-45.986,128.815) -46.133,128.963 -46.133,129.262 -46.567,129.696 -47.305,129.696 -47.749,129.252 -47.749,123.626 -47.012,122.889 -45.622,122.889 v1(-45.483,122.75)
USB_GND: C101.1 C104.2 C105.1 C106.1 JP1.3 LED7.1 R88.1 R89.1 R100.1 U3.2 U3.8 U16.3@-45.597,129.434 U16.8@-45.597,130.27 USB101.1 USB101.2 USB101.3 USB101.4 USB101.A1 USB101.A12 USB101.B1 USB101.B12 | length 33.5
  Top Signal w0.3: v1(-50.305,130.205) -49.617,130.205 R100.1@-49.587,130.175 ; C101.1@-49.489,128.849 -49.489,131.167 -49.095,131.561 USB101.A12@-49.095,132.12 -49.095,132.919 -48.845,133.169 USB101.B1@-48.845,133.72 ; U16.8@-45.597,130.348 -45.576,130.369 U16.8@-45.592,130.385 ; U16.3@-45.592,129.496 v1@-45.592,130.806 ; C106.1@-43.642,128.138 C106.1@-43.586,128.194 ; USB101.B12@-43.345,133.72 -43.345,133.031 -43.595,132.781 USB101.A1@-43.595,132.12 v1(-43.164,132.12)
  Top Signal w0.5: v1(-44.177,128.138) C106.1@-43.642,128.138 ; C105.1@-43.622,128.908 -43.492,128.778 U3.2@-41.389,128.778
  Top Signal w0.762: LED7.1@-53.136,124.939 JP1.3@-53.136,121.322 -52.559,120.745 C104.2@-49.022,120.745 -46.788,120.745 ; C104.2@-48.25,121.517 R88.1@-48.25,124.8 R89.1@-46.702,124.8 -45.46,124.8 ; v3@-46.312,120.269 -41.389,120.269
  other v1: -42.929,120.216 -39.573,120.242 -54.48,120.38 -49.813,122.624 -51.739,123.353 -57.196,123.762 -44.048,124.564 -39.56,124.717 -49.58,124.813 -54.364,124.898 -49.638,126.447 -45.25,126.644 -56.528,126.722 -39.613,127.98 -54.541,128.081 -42.836,128.761 -57.255,129.365 -52.06,129.423 -45.556,130.806 -53.344,130.912 -49.501,130.909 -42.25,131.247 -39.533,131.588 -39.512,133.772 -57.255,134.501 -53.753,138.528
  other v3: -46.013,120.267 -52.074,120.731 -48.195,122.146 -53.14,123.7 -45.46,125.689
VDD: C9.2 C10.2 C11.2 C12.2 C13.2 TP1.1 U1.4 U1.46 U1.71 U1.87 U18.4 U18.44 U18.59 | length 66.7
  Top Signal w0.2: v1@-32.473,56.373 U1.46@-31.756,57.09 ; U18.4@-31.314,70.54 v1@-30.896,70.122 ; U18.4@-31.31,70.54 -30.946,70.175 v1(-30.877,70.175) ; v1(-26.841,69.435) U18.59@-26.423,69.853 ; v1@-25.037,63.59 -25.029,63.59 -24.487,63.048 -24.487,63.044 -24.025,62.578 U18.44@-24.02,62.573 ; U1.87@-23.153,70.617 -22.352,71.418 -22.352,72.123 TP1.1@-22.352,72.161 ; U1.71@-21.008,62.746 -19.958,61.696 v1(-19.945,61.696)
  Top Signal w0.254: v1(-32.358,75.125) -32.358,74.836 -31.402,73.88 U1.4@-31.402,73.848
  PWR w0.2: v1@-25.006,63.567 v1(-25.006,63.569)
  PWR w0.3: v1(-26.841,69.435) -25.94,70.336 -25.94,70.341 ; v1@-24.964,63.563 -23.567,62.166 ; v1@-24.947,63.563 v1@-24.936,63.563
  PWR w0.5: v1(-32.515,56.336) -32.283,56.568 -29.111,56.568 -22.7,62.979 -22.7,65.531 -22.972,65.803 -22.972,67.373 -25.94,70.341 -27.267,71.668 -30.27,71.668 -31.076,70.862 -31.076,70.381 v1@-30.883,70.187
  Bottom Signal w0.2: v1(-32.515,56.336) -32.515,56.342 -32.098,56.759 C10.2@-32.098,56.951 ; v1@-30.946,70.175 v1(-30.877,70.175) ; v1@-26.844,69.438 v1(-26.841,69.435) ; v1(-25.006,63.569) v1@-25.006,63.648
  Bottom Signal w0.3: v1(-32.358,75.125) -32.216,75.125 C11.2@-31.913,74.823 -31.621,75.115 -30.969,75.115 -29.692,73.838 -29.692,72.929 -31.378,71.243 -31.378,70.662 v1@-30.897,70.181 ; v1(-26.841,69.435) -26.263,70.013 -25.703,70.013 -24.825,69.135 -22.895,69.135 -21.644,70.386 -21.644,71.079 -21.644,71.224 -22.27,71.851 TP1.1@-22.27,72.638 ; v1(-25.006,63.569) -24.348,62.912 -23.087,62.912 -22.215,63.784 -20.288,63.784 -19.251,62.747 -19.251,62.114 -19.669,61.696 v1(-19.945,61.696)